# Altium PCB gY-950A20200704V1.PcbDoc (part 5 of 5)
Units mm, origin at the board's own origin, x right, y up, seen from the top; angles counter-clockwise.
Board outline 59.48 x 100.3 mm, 2 copper layers (Top Layer, Bottom Layer), stack 0.193 mm thick; 144 components, 124 nets, 550 pads, 234 vias.
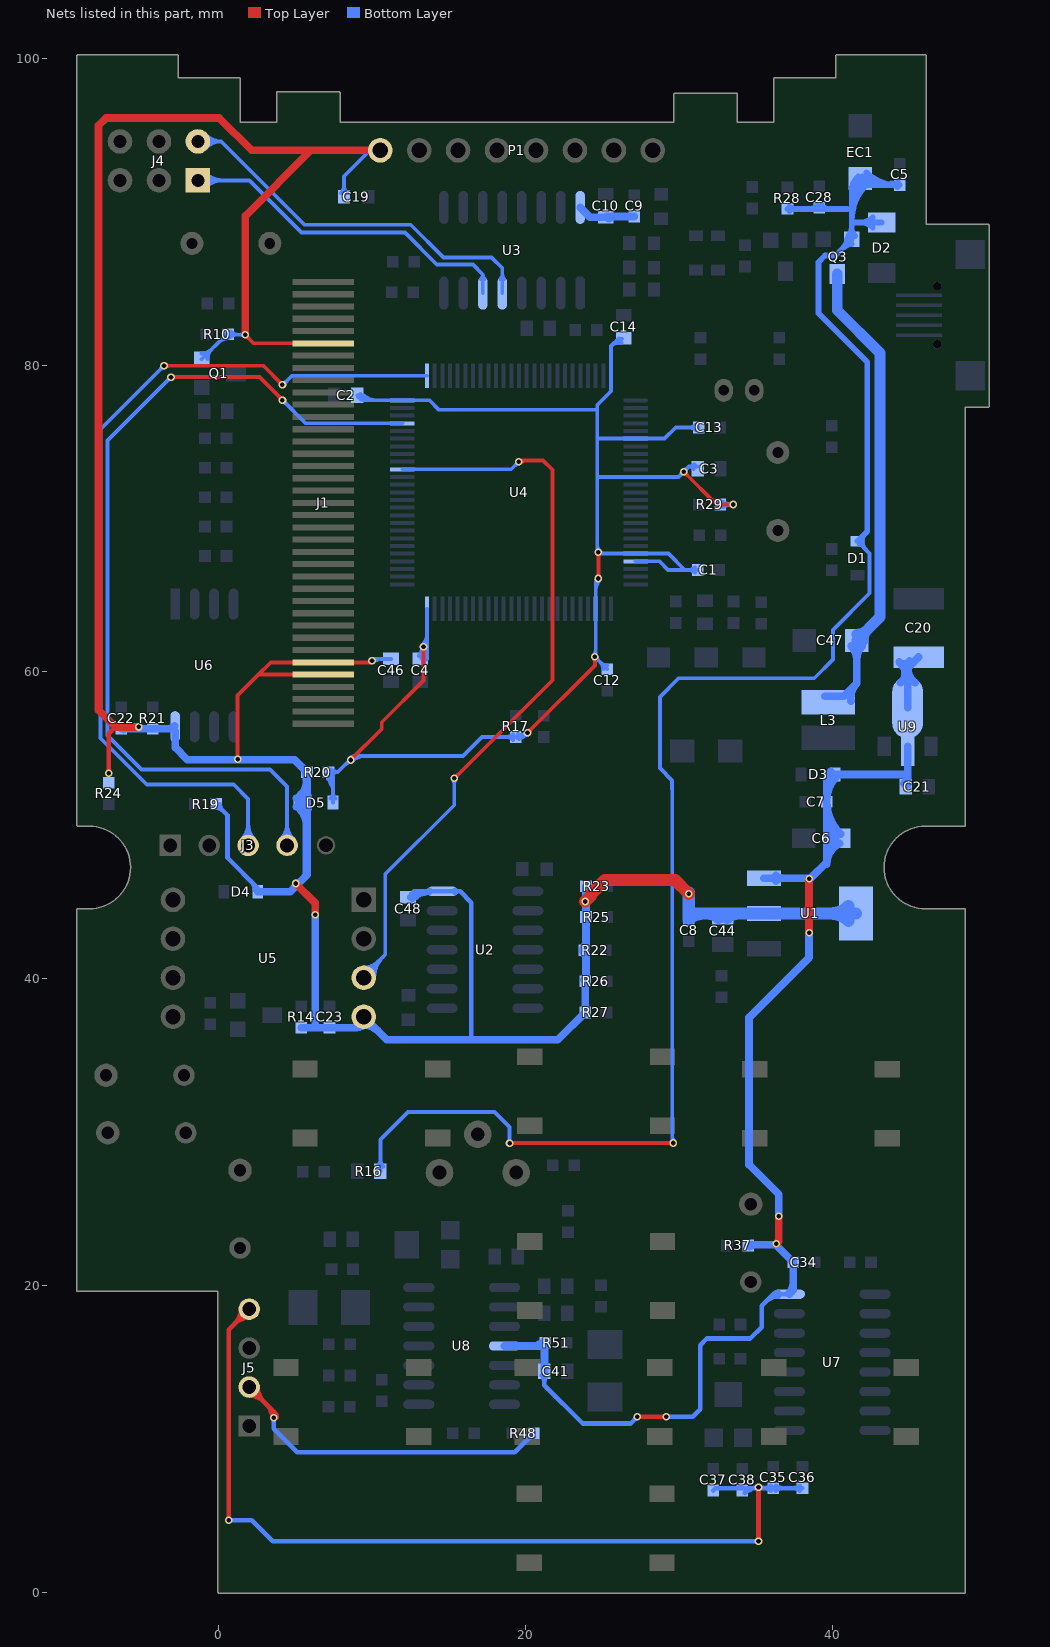
[diagram p5: the nets of this part, all layers, seen from the top]

## Via types
v1: diameter 0.5, hole 0.3, Top Layer to Bottom Layer, tented both sides, 234 vias

## Nets (pads, with @x,y where several pads share a name; then routed paths per layer and width w, separated by ;. In a path a pad name is that pad's centre, name@x,y a point inside that pad or via, vN(x,y) a via of type N, cw(c..) or ccw(c..) an arc to the next point about the centre after c; other vN are vias at no path point) (continued)
SPKP: U4.66 U5.3 | length 59.4
  Top Layer w0.254: v1(15.342,53.061) 21.738,59.457 21.738,73.181 21.137,73.783 19.63,73.783 v1(19.558,73.711) ; 15.552,53.271 cw(c15.342,53.481) 15.342,53.184 ccw(c15.342,53.481) 15.552,53.271 ; 15.552,53.271 ccw(c15.762,53.061) 15.465,53.061 cw(c15.762,53.061) 15.552,53.271 ; v1@19.645,73.624 cw(c20.029,73.24) 20.029,73.783 ccw(c20.029,73.24) v1@19.645,73.624
  Bottom Layer w0.25: U4.66@11.966,73.212 19.059,73.212 v1(19.558,73.711) ; 19.345,73.497 cw(c19.558,73.284) 19.558,73.586 ccw(c19.558,73.284) 19.345,73.497 ; 19.345,73.497 ccw(c19.131,73.711) 19.433,73.711 cw(c19.131,73.711) 19.345,73.497
  Bottom Layer w0.254: U5.3@9.322,40.056 10.846,41.58 10.846,46.812 15.342,51.308 v1(15.342,53.061) ; 15.342,52.764 cw(c15.639,52.764) 15.429,52.974 ccw(c15.639,52.764) 15.342,52.764 ; 15.342,52.764 ccw(c15.045,52.764) 15.255,52.974 cw(c15.045,52.764) 15.342,52.764 ; U5.3@9.449,40.729 ccw(c9.449,42.047) 10.381,41.115 cw(c9.449,42.047) U5.3@9.449,40.729 ; U5.3@9.868,40.056 cw(c11.186,40.056) 10.254,40.988 ccw(c11.186,40.056) U5.3@9.868,40.056 ; U5.3@10.122,40.056 cw(c12.053,40.056) 10.687,41.421 ccw(c12.053,40.056) U5.3@10.122,40.056
TCK/SWCLK: J3.3 U4.76 | length 68.8
  Top Layer w0.25: v1(-3.581,79.959) 2.896,79.959 v1(4.14,78.715) ; -3.28,79.959 cw(c-3.28,80.261) -3.493,80.048 ccw(c-3.28,80.261) -3.28,79.959 ; -3.28,79.959 ccw(c-3.28,79.657) -3.493,79.871 cw(c-3.28,79.657) -3.28,79.959 ; 3.927,78.928 cw(c3.713,78.715) 4.015,78.715 ccw(c3.713,78.715) 3.927,78.928 ; 3.927,78.928 ccw(c4.14,79.141) 4.14,78.84 cw(c4.14,79.141) 3.927,78.928
  Bottom Layer w0.25: v1(-3.581,79.959) -7.718,75.823 -7.718,55.673 -4.703,52.658 0.961,52.658 1.905,51.714 J3.3@1.905,48.688 ; v1@4.191,78.74 4.763,79.312 U4.76@13.566,79.312 ; -3.795,79.746 cw(c-3.581,79.532) -3.581,79.834 ccw(c-3.581,79.532) -3.795,79.746 ; -3.795,79.746 ccw(c-4.008,79.959) -3.706,79.959 cw(c-4.008,79.959) -3.795,79.746 ; 1.905,49.472 cw(c1.12,49.472) 1.675,48.918 ccw(c1.12,49.472) 1.905,49.472 ; 1.905,49.472 ccw(c2.69,49.472) 2.135,48.918 cw(c2.69,49.472) 1.905,49.472 ; 1.905,50.076 cw(c0.517,50.076) 1.498,49.094 ccw(c0.517,50.076) 1.905,50.076 ; 1.905,50.076 ccw(c3.293,50.076) 2.312,49.094 cw(c3.293,50.076) 1.905,50.076 ; v1@4.14,78.84 ccw(c4.14,79.203) 4.397,78.946 cw(c4.14,79.203) v1@4.14,78.84 ; v1@4.265,78.715 cw(c4.506,78.715) 4.336,78.885 ccw(c4.506,78.715) v1@4.265,78.715
TMS/SWDIO: J3.4 U4.72 | length 69
  Top Layer w0.25: v1(-3.124,79.223) 2.642,79.223 v1(4.14,77.724) ; -2.822,79.223 cw(c-2.822,79.524) -3.036,79.311 ccw(c-2.822,79.524) -2.822,79.223 ; -2.822,79.223 ccw(c-2.822,78.921) -3.036,79.134 cw(c-2.822,78.921) -2.822,79.223 ; 3.927,77.937 cw(c3.713,77.724) 4.015,77.724 ccw(c3.713,77.724) 3.927,77.937 ; 3.927,77.937 ccw(c4.14,78.151) 4.14,77.849 cw(c4.14,78.151) 3.927,77.937
  Bottom Layer w0.25: v1(-3.124,79.223) -7.264,75.082 -7.264,55.861 -5.049,53.645 3.327,53.645 4.445,52.527 J3.4@4.445,48.692 ; v1(4.14,77.724) 5.652,76.212 U4.72@11.966,76.212 ; -3.338,79.009 cw(c-3.124,78.796) -3.124,79.098 ccw(c-3.124,78.796) -3.338,79.009 ; -3.338,79.009 ccw(c-3.551,79.223) -3.249,79.223 cw(c-3.551,79.223) -3.338,79.009 ; 4.354,77.511 cw(c4.567,77.724) 4.265,77.724 ccw(c4.567,77.724) 4.354,77.511 ; 4.354,77.511 ccw(c4.14,77.297) 4.14,77.599 cw(c4.14,77.297) 4.354,77.511 ; 4.445,49.476 cw(c3.66,49.476) 4.215,48.922 ccw(c3.66,49.476) 4.445,49.476 ; 4.445,49.476 ccw(c5.23,49.476) 4.675,48.922 cw(c5.23,49.476) 4.445,49.476 ; 4.445,50.08 cw(c3.057,50.08) 4.038,49.098 ccw(c3.057,50.08) 4.445,50.08 ; 4.445,50.08 ccw(c5.833,50.08) 4.852,49.098 cw(c5.833,50.08) 4.445,50.08
USB_D+: J4.2 U3.5 | length 33.8
  Bottom Layer w0.25: J4.2@-1.372,94.59 0.152,94.59 ; U3.5@18.474,84.696 18.474,86.326 17.78,87.02 14.644,87.02 12.51,89.154 5.588,89.154 0.152,94.59 ; -0.412,94.59 cw(c-0.412,95.46) -1.057,94.875 ccw(c-0.412,95.46) -0.412,94.59 ; -0.412,94.59 ccw(c-0.412,93.719) -1.057,94.304 cw(c-0.412,93.719) -0.412,94.59 ; 0.152,94.59 cw(c0.152,95.972) -0.872,95.043 ccw(c0.152,95.972) 0.152,94.59 ; 0.152,94.59 ccw(c0.152,93.207) -0.872,94.136 cw(c0.152,93.207) 0.152,94.59 ; 18.474,85.905 cw(c18.04,85.905) 18.347,85.598 ccw(c18.04,85.905) 18.474,85.905 ; 18.474,85.905 ccw(c18.909,85.905) 18.602,85.598 cw(c18.909,85.905) 18.474,85.905
USB_D-: J4.1 U3.6 | length 32
  Bottom Layer w0.25: J4.1@-1.372,92.05 1.981,92.05 5.385,88.646 12.123,88.646 14.202,86.567 16.557,86.567 17.204,85.92 U3.6@17.204,84.696 ; -0.346,92.05 cw(c-0.346,93.076) -1.071,92.35 ccw(c-0.346,93.076) -0.346,92.05 ; -0.346,92.05 ccw(c-0.346,91.024) -1.071,91.749 cw(c-0.346,91.024) -0.346,92.05 ; 0.258,92.05 cw(c0.258,93.679) -0.894,92.527 ccw(c0.258,93.679) 0.258,92.05 ; 0.258,92.05 ccw(c0.258,90.42) -0.894,91.572 cw(c0.258,90.42) 0.258,92.05 ; 17.204,85.905 cw(c16.77,85.905) 17.077,85.598 ccw(c16.77,85.905) 17.204,85.905 ; 17.204,85.905 ccw(c17.639,85.905) 17.332,85.598 cw(c17.639,85.905) 17.204,85.905
VBAT: C1.1 C2.1 C3.1 C4.1 C12.1 C13.1 C14.1 D5.2 R17.1 R20.2 R29.2 U4.6 U4.11 U4.21 U4.22 U4.28 U4.50 U4.75 U4.100 | length 173.6
  Top Layer w0.25: v1(8.585,54.254) 10.617,56.286 10.617,56.718 13.335,59.436 v1(13.335,61.646) ; v1@8.585,54.379 ccw(c8.585,54.681) 8.799,54.468 ccw(c9.012,54.254) v1@8.71,54.254 ; v1(20.117,56.032) 24.511,60.427 v1(24.511,60.985) ; v1(24.74,66.091) v1@24.74,67.751 ; v1(30.307,73.055) 32.445,70.917 v1(33.528,70.917) ; 13.335,61.344 cw(c13.637,61.344) 13.423,61.557 ccw(c13.637,61.344) 13.335,61.344 ; 13.335,61.344 ccw(c13.033,61.344) 13.247,61.557 cw(c13.033,61.344) 13.335,61.344 ; 20.33,56.246 cw(c20.117,56.459) 20.117,56.157 ccw(c20.117,56.459) 20.33,56.246 ; 20.33,56.246 ccw(c20.544,56.032) 20.242,56.032 cw(c20.544,56.032) 20.33,56.246 ; 24.511,60.684 cw(c24.813,60.684) 24.599,60.897 ccw(c24.813,60.684) 24.511,60.684 ; 24.511,60.684 ccw(c24.209,60.684) 24.423,60.897 cw(c24.209,60.684) 24.511,60.684 ; 24.74,66.393 cw(c24.438,66.393) 24.651,66.179 ccw(c24.438,66.393) 24.74,66.393 ; 24.74,66.393 ccw(c25.041,66.393) 24.828,66.179 cw(c25.041,66.393) 24.74,66.393 ; 24.74,67.491 cw(c25.041,67.491) 24.828,67.704 ccw(c25.041,67.491) 24.74,67.491 ; 24.74,67.491 ccw(c24.438,67.491) 24.651,67.704 cw(c24.438,67.491) 24.74,67.491 ; 30.52,72.841 cw(c30.733,73.055) 30.432,73.055 ccw(c30.733,73.055) 30.52,72.841 ; 30.52,72.841 ccw(c30.307,72.628) 30.307,72.93 cw(c30.307,72.628) 30.52,72.841 ; 33.226,70.917 cw(c33.226,70.615) 33.44,70.828 ccw(c33.226,70.615) 33.226,70.917 ; 33.226,70.917 ccw(c33.226,71.219) 33.44,71.005 cw(c33.226,71.219) 33.226,70.917
  Bottom Layer w0.25: R20.2@7.092,53.215 cw(c7.011,52.771) 7.402,52.997 cw(c7.776,53.212) R20.2@7.375,53.372 ; 7.119,53.005 cw(c7.485,53.216) R20.2@7.142,53.463 ; 7.312,52.67 cw(c7.828,52.968) R20.2@7.345,53.317 ; D5.2@7.44,51.486 7.44,53.165 R20.2@7.137,53.467 7.747,53.467 ; 8.285,54.005 cw(c8.585,53.705) v1@8.585,54.129 ; v1@8.497,54.343 cw(c8.906,53.933) 8.906,54.512 ; v1@8.674,54.166 cw(c9.51,53.33) 9.51,54.512 ; v1@8.709,54.27 cw(c8.999,54.306) 8.792,54.512 ; C2.1@9.03,78.037 9.355,77.712 U4.75@11.966,77.712 13.728,77.712 14.351,77.089 24.663,77.089 ; C2.1@9.054,77.916 cw(c9.311,77.697) 9.48,77.99 ; C2.1@9.244,77.754 cw(c9.544,77.5) 9.74,77.84 ; C4.1@13.152,61.118 ccw(c13.003,61.674) 13.502,61.386 ; 13.228,61.395 ccw(c13.658,61.147) C4.1@13.251,60.864 ; v1@13.425,61.736 ccw(c14.014,61.396) C4.1@13.456,61.007 ; v1@13.441,61.712 cw(c13.626,61.828) 13.462,61.973 ; v1@13.451,61.599 ccw(c13.863,61.43) C4.1@13.49,61.187 ; C4.1@13.485,60.953 cw(c13.963,61.151) 13.515,61.409 ; C4.1@13.53,60.846 13.566,60.882 U4.50@13.566,64.112 ; 19.813,55.747 cw(c20.092,55.586) v1@20.11,55.908 ; 24.631,65.662 ccw(c24.315,65.845) v1@24.631,66.028 ; 24.681,72.712 U4.11@27.166,72.712 29.964,72.712 v1(30.307,73.055) 30.649,73.397 ; 24.686,75.212 U4.6@27.166,75.212 29.06,75.212 29.788,75.94 C13.1@31.275,75.94 ; v1(24.74,66.091) 24.566,65.917 U4.28@24.566,64.112 24.566,60.928 C12.1@25.323,60.172 ; C14.1@26.069,81.75 25.566,81.247 ; U4.22@27.166,67.212 28.724,67.212 29.287,66.649 30.375,66.649 ; C3.1@31.204,73.397 30.649,73.397 ; C1.1@31.218,66.649 30.375,66.649 ; R29.2@32.69,70.917 v1(33.528,70.917) ; 7.44,52.129 cw(c6.896,52.129) 7.281,51.745 ccw(c6.896,52.129) 7.44,52.129 ; 7.44,52.129 ccw(c7.983,52.129) 7.599,51.745 cw(c7.983,52.129) 7.44,52.129 ; 7.747,53.467 cw(c7.747,54.065) 7.32,53.646 ccw(c7.747,54.065) 7.747,53.467 ; 7.747,53.467 ccw(c7.747,52.869) 7.32,53.288 cw(c7.747,52.869) 7.747,53.467 ; 7.747,53.467 8.792,54.512 ; 8.792,54.512 15.91,54.512 17.151,55.753 R17.1@19.355,55.753 19.837,55.753 ; C4.1@13.127,61.196 ccw(c12.656,61.512) v1@13.212,61.622 ; C4.1@13.127,61.196 ccw(c12.656,61.512) v1@13.212,61.622 ; C4.1@13.127,61.196 ccw(c12.656,61.512) v1@13.212,61.622 ; v1@13.266,61.75 ccw(c12.931,62.252) 13.523,62.133 ; v1@13.266,61.75 ccw(c12.931,62.252) 13.523,62.133 ; v1@13.266,61.75 ccw(c12.931,62.252) 13.523,62.133 ; 18.737,55.753 cw(c18.737,55.135) 19.174,55.572 ccw(c18.737,55.135) 18.737,55.753 ; 18.737,55.753 ccw(c18.737,56.371) 19.174,55.934 cw(c18.737,56.371) 18.737,55.753 ; R17.1@19.729,55.716 ccw(c19.441,56.213) v1@19.996,56.065 ; R17.1@19.729,55.716 ccw(c19.441,56.213) v1@19.996,56.065 ; R17.1@19.729,55.716 ccw(c19.441,56.213) v1@19.996,56.065 ; 19.837,55.753 cw(c19.837,56.08) 19.567,55.897 ccw(c19.837,56.08) 19.837,55.753 ; 19.837,55.753 ccw(c19.837,55.426) 19.567,55.609 cw(c19.837,55.426) 19.837,55.753 ; 19.837,55.753 v1(20.117,56.032) ; 19.903,55.819 cw(c20.117,55.606) 20.117,55.907 ccw(c20.117,55.606) 19.903,55.819 ; 19.903,55.819 ccw(c19.69,56.032) 19.992,56.032 cw(c19.69,56.032) 19.903,55.819 ; v1(20.117,56.032) cw(c19.766,56.384) 19.495,55.967 ccw(c19.766,56.384) v1(20.117,56.032) ; 24.663,77.089 24.663,67.793 24.744,67.712 U4.21@27.166,67.712 29.312,67.712 30.375,66.649 ; 24.663,77.089 24.663,77.394 25.566,78.297 U4.100@25.566,79.312 25.566,81.247 ; v1@24.828,67.881 ccw(c25.236,68.289) 25.236,67.712 cw(c25.236,68.289) v1@24.828,67.881 ; v1@24.828,67.881 cw(c25.225,68.278) 24.663,68.278 ccw(c25.225,68.278) v1@24.828,67.881 ; 24.886,60.609 cw(c24.449,60.172) 25.067,60.172 ccw(c24.449,60.172) 24.886,60.609 ; 24.886,60.609 ccw(c25.323,61.046) 25.323,60.428 cw(c25.323,61.046) 24.886,60.609 ; 25.566,81.247 cw(c26.132,80.681) 26.254,81.472 ccw(c26.132,80.681) 25.566,81.247 ; 30.093,72.841 cw(c30.307,72.628) 30.307,72.93 ccw(c30.307,72.628) 30.093,72.841 ; 30.093,72.841 ccw(c29.88,73.055) 30.182,73.055 cw(c29.88,73.055) 30.093,72.841 ; 30.52,73.268 cw(c30.307,73.482) 30.307,73.18 ccw(c30.307,73.482) 30.52,73.268 ; 30.52,73.268 ccw(c30.733,73.055) 30.432,73.055 cw(c30.733,73.055) 30.52,73.268 ; 30.6,66.649 cw(c30.6,66.031) 31.037,66.468 ccw(c30.6,66.031) 30.6,66.649 ; 30.6,66.649 ccw(c30.6,67.267) 31.037,66.83 cw(c30.6,67.267) 30.6,66.649 ; 30.649,73.397 cw(c30.649,73.05) 30.956,73.214 ccw(c30.649,73.05) 30.649,73.397 ; 30.649,73.397 ccw(c30.649,73.898) 31.004,73.545 cw(c30.649,73.898) 30.649,73.397 ; 30.657,75.94 cw(c30.657,75.322) 31.094,75.759 ccw(c30.657,75.322) 30.657,75.94 ; 30.657,75.94 ccw(c30.657,76.558) 31.094,76.121 cw(c30.657,76.558) 30.657,75.94 ; 33.094,70.86 cw(c33.219,70.393) v1@33.465,70.809 ; 33.094,70.86 cw(c33.219,70.393) v1@33.465,70.809 ; 33.094,70.86 cw(c33.219,70.393) v1@33.465,70.809 ; 33.094,70.974 ccw(c33.219,71.441) v1@33.465,71.024 ; 33.094,70.974 ccw(c33.219,71.441) v1@33.465,71.024 ; 33.094,70.974 ccw(c33.219,71.441) v1@33.465,71.024 ; 33.226,70.917 cw(c33.226,70.615) 33.44,70.828 ccw(c33.226,70.615) 33.226,70.917 ; 33.226,70.917 ccw(c33.226,71.219) 33.44,71.005 cw(c33.226,71.219) 33.226,70.917 ; v1@33.308,70.917 cw(c33.308,71.535) 32.871,71.098 ccw(c33.308,71.535) v1@33.308,70.917 ; v1@33.308,70.917 ccw(c33.308,70.299) 32.871,70.736 cw(c33.308,70.299) v1@33.308,70.917 ; R20.2@6.956,53.286 cw(c5.79,52.119) 7.44,52.119 ccw(c5.79,52.119) R20.2@6.956,53.286 ; R20.2@7.133,53.463 cw(c6.393,52.723) 7.44,52.723 ccw(c6.393,52.723) R20.2@7.133,53.463 ; C2.1@9.052,77.958 ccw(c9.646,78.552) 9.646,77.712 cw(c9.646,78.552) C2.1@9.052,77.958 ; C2.1@9.229,78.135 ccw(c10.249,79.155) 10.249,77.712 cw(c10.249,79.155) C2.1@9.229,78.135 ; C4.1@13.026,61.045 ccw(c11.721,62.35) 13.566,62.35 cw(c11.721,62.35) C4.1@13.026,61.045 ; C4.1@13.203,60.868 ccw(c12.325,61.746) 13.566,61.746 cw(c12.325,61.746) C4.1@13.203,60.868 ; v1@13.247,61.734 ccw(c12.475,62.506) 13.566,62.506 cw(c12.475,62.506) v1@13.247,61.734 ; v1@13.252,61.553 cw(c12.62,60.848) 13.566,60.848 ccw(c12.62,60.848) v1@13.252,61.553 ; C4.1@13.379,60.691 ccw(c12.928,61.142) 13.566,61.142 cw(c12.928,61.142) C4.1@13.379,60.691 ; v1@13.418,61.739 cw(c13.122,61.408) 13.566,61.408 ccw(c13.122,61.408) v1@13.418,61.739 ; v1@13.423,61.557 ccw(c13.079,61.902) 13.566,61.902 cw(c13.079,61.902) v1@13.423,61.557 ; R17.1@19.358,55.758 ccw(c19.594,56.12) 19.899,55.814 cw(c19.594,56.12) R17.1@19.358,55.758 ; v1@24.423,61.074 ccw(c24.076,61.42) 24.566,61.42 cw(c24.076,61.42) v1@24.423,61.074 ; v1@24.511,60.86 cw(c24.511,60.563) 24.721,60.773 ccw(c24.511,60.563) v1@24.511,60.86 ; 24.566,65.37 cw(c25.46,65.37) 24.828,66.002 ccw(c25.46,65.37) 24.566,65.37 ; v1@24.636,60.985 ccw(c24.943,60.985) 24.726,60.769 cw(c24.943,60.985) v1@24.636,60.985 ; C14.1@25.914,81.595 cw(c26.225,81.284) 26.293,81.719 ccw(c26.225,81.284) C14.1@25.914,81.595
  other v1: 24.74,67.793
VBB: C5.1 C28.2 D1.2 D2.K EC1.1 Q3.S R16.2 R28.2 | length 153.9
  Top Layer w0.25: v1@18.847,29.286 v1@29.591,29.286 ; 29.315,29.286 cw(c29.315,28.984) 29.528,29.198 ccw(c29.315,28.984) 29.315,29.286 ; 29.315,29.286 ccw(c29.315,29.588) 29.528,29.375 cw(c29.315,29.588) 29.315,29.286 ; v1@19.037,29.172 cw(c19.312,28.898) 19.312,29.286 ccw(c19.312,28.898) v1@19.037,29.172
  Bottom Layer w0.25: R16.2@10.528,27.449 10.528,29.502 12.325,31.299 17.977,31.299 18.948,30.328 v1(18.948,29.261) ; v1@29.591,29.286 29.553,29.286 29.553,52.362 29.548,52.367 29.548,52.932 28.753,53.727 28.753,58.369 29.972,59.588 38.811,59.588 40.03,60.808 40.03,62.738 42.426,65.133 42.426,67.732 D1.2@41.631,68.527 ; D1.2@41.739,68.55 cw(c41.583,68.108) D1.2@42.035,68.23 ; 10.528,28.23 cw(c9.849,28.23) 10.329,27.749 ccw(c9.849,28.23) 10.528,28.23 ; 10.528,28.23 ccw(c11.208,28.23) 10.727,27.749 cw(c11.208,28.23) 10.528,28.23 ; 18.948,29.563 cw(c18.647,29.563) 18.86,29.349 ccw(c18.647,29.563) 18.948,29.563 ; 18.948,29.563 ccw(c19.25,29.563) 19.037,29.349 cw(c19.25,29.563) 18.948,29.563 ; 29.553,29.741 ccw(c30.071,29.741) 29.705,29.375 cw(c30.071,29.741) 29.553,29.741 ; D1.2@41.731,68.302 cw(c41.731,68) 41.944,68.213 ccw(c41.731,68) D1.2@41.731,68.302 ; D1.2@41.956,68.527 ccw(c42.74,68.527) 42.185,67.972 cw(c42.74,68.527) D1.2@41.956,68.527
  Bottom Layer w0.381: R28.2@37.065,90.191 40.977,90.191 ; 41.308,89.304 D2.K@43.205,89.304 ; EC1.1@41.35,91.837 cw(c40.775,91.422) 41.389,91.067 ; 41.505,91.269 cw(c42.156,90.893) EC1.1@41.962,91.619 ; D1.2@41.631,68.527 42.266,69.162 42.266,80.213 39.091,83.388 39.091,86.716 39.522,87.147 40.201,87.147 Q3.S@41.255,88.201 41.255,91.612 EC1.1@41.384,91.741 ; D1.2@41.806,68.527 D1.2@41.885,68.527 ; EC1.1@41.814,92.171 EC1.1@41.384,91.741 ; EC1.1@42.235,91.785 cw(c42.524,91.52) 42.72,91.86 ; EC1.1@42.366,92.319 ccw(c43.092,92.513) 42.716,91.862 ; C5.1@44.381,91.741 EC1.1@41.384,91.741 ; 37.525,90.191 cw(c37.525,90.651) 37.2,90.325 ccw(c37.525,90.651) 37.525,90.191 ; 37.525,90.191 ccw(c37.525,89.731) 37.2,90.056 cw(c37.525,89.731) 37.525,90.191 ; 40.727,87.673 cw(c41.255,87.145) 41.255,87.892 ccw(c41.255,87.145) 40.727,87.673 ; 40.727,87.673 ccw(c40.199,88.201) 40.946,88.201 cw(c40.199,88.201) 40.727,87.673 ; 41.255,88.949 cw(c40.508,88.949) 41.036,88.42 ccw(c40.508,88.949) 41.255,88.949 ; 41.255,88.949 ccw(c42.003,88.949) 41.474,88.42 cw(c42.003,88.949) 41.255,88.949 ; 41.846,89.304 cw(c41.846,88.195) 42.63,88.979 ccw(c41.846,88.195) 41.846,89.304 ; 41.846,89.304 ccw(c41.846,90.414) 42.63,89.629 cw(c41.846,90.414) 41.846,89.304 ; 43.921,91.741 cw(c43.921,91.281) 44.246,91.606 ccw(c43.921,91.281) 43.921,91.741 ; 43.921,91.741 ccw(c43.921,92.201) 44.246,91.876 cw(c43.921,92.201) 43.921,91.741 ; 38.505,90.191 ccw(c38.505,90.907) 39.012,90.401 cw(c38.505,90.907) 38.505,90.191 ; C28.2@39.281,90.401 ccw(c39.788,90.907) 39.788,90.191 cw(c39.788,90.907) C28.2@39.281,90.401 ; 41.255,89.443 cw(c44.542,89.443) 42.218,91.767 ccw(c44.542,89.443) 41.255,89.443 ; 41.255,90.363 cw(c43.622,90.363) 41.948,92.036 ccw(c43.622,90.363) 41.255,90.363 ; 41.255,91.283 cw(c42.702,91.283) 41.679,92.306 ccw(c42.702,91.283) 41.255,91.283 ; D1.2@41.89,68.527 cw(c42.517,68.527) 42.074,68.97 ccw(c42.517,68.527) D1.2@41.89,68.527 ; EC1.1@41.948,92.306 ccw(c43.311,93.668) 43.311,91.741 cw(c43.311,93.668) EC1.1@41.948,92.306 ; EC1.1@42.218,92.575 ccw(c44.231,94.588) 44.231,91.741 cw(c44.231,94.588) EC1.1@42.218,92.575 ; 43.841,91.838 ccw(c43.982,92.404) 44.283,91.904 cw(c43.982,92.404) 43.841,91.838
  other v1: 29.616,29.286
VCC3.3: C8.2 C19.1 C22.2 C23.2 C44.2 C46.1 C48.2 D4.2 D5.1 J1.6 J1.32 J1.33 P1.1 Q1.S R10.1 R14.1 R19.1 R20.1 R21.2 R22.1 R23.1 R24.1 R25.1 R26.1 R27.1 U1.2 U2.14 U5.4 U6.8 | length 275.7
  Top Layer w0.25: v1(1.219,54.305) 1.219,58.471 2.574,59.825 ; v1(1.708,81.986) 2.269,81.425 J1.6@6.807,81.425 ; J1.33@6.807,59.825 2.574,59.825 ; v1@9.876,60.625 J1.32@6.807,60.625 3.374,60.625 2.574,59.825 ; 1.921,81.773 cw(c2.135,81.986) 1.833,81.986 ccw(c2.135,81.986) 1.921,81.773 ; 1.921,81.773 ccw(c1.708,81.56) 1.708,81.861 cw(c1.708,81.56) 1.921,81.773
  Top Layer w0.3: v1(-7.188,53.391) -7.188,55.982 -6.756,56.413
  Top Layer w0.5: v1(-5.232,56.413) -6.756,56.413 -7.849,57.506 -7.849,95.631 -7.366,96.114 0.025,96.114 2.132,94.007 5.991,94.007 5.989,94.004 ; v1(1.708,81.986) 1.708,89.724 5.989,94.004 ; v1(5.004,46.203) 6.274,44.933 v1(6.274,44.171) ; P1.1@10.512,94.004 5.989,94.004
  Top Layer w0.8: v1(23.876,45.034) 24.257,45.415 24.257,45.517 25.171,46.431 29.744,46.431 v1(30.633,45.542)
  Bottom Layer w0.25: Q1.S@-1.129,80.386 0.498,82.012 R10.1@0.591,82.012 0.616,81.986 v1(1.708,81.986) ; Q1.S@-1.129,80.761 ccw(c-1.129,81.666) -0.489,81.026 ccw(c0.152,80.386) Q1.S@-0.754,80.386 ; -0.005,81.509 cw(c0.591,80.913) R10.1@0.591,81.756 ; R10.1@0.219,81.734 ccw(c-0.059,82.012) R10.1@0.335,82.012 ; R10.1@0.772,81.831 cw(c1.147,81.455) 1.147,81.986 ; R10.1@0.772,82.193 ccw(c1.27,82.691) 1.27,81.986 ; v1@1.62,81.898 ccw(c1.406,81.685) 1.406,81.986 ccw(c1.406,82.288) v1@1.62,82.075 ; C19.1@7.953,91.223 ccw(c7.483,91.692) 8.147,91.692 ccw(c8.811,91.692) C19.1@8.342,91.223 ; C19.1@8.147,90.978 8.147,92.323 9.829,94.004 P1.1@10.512,94.004 ; v1(9.982,60.731) 10.097,60.846 C46.1@11.218,60.846 ; v1@10.07,60.82 ccw(c10.217,60.967) 10.321,60.787
  Bottom Layer w0.3: C22.2@-6.213,56.122 cw(c-5.486,55.395) -5.486,56.423 ; C22.2@-6.179,56.405 ccw(c-5.98,56.525) -5.864,56.324 ; R19.1@-0.178,51.384 0.559,50.648 0.559,47.879 D4.2@2.535,45.903 ; v1@5.004,46.303 ccw(c5.004,46.973) 5.478,46.499 ; D5.1@5.179,51.188 cw(c5.089,50.602) 5.603,50.898 ; D5.1@5.21,51.486 5.613,51.082 ; v1@5.232,46.253 5.613,46.634 5.613,46.642 5.613,51.082 ; D5.1@5.401,51.327 ccw(c6.391,51.024) 5.494,50.507 ; C48.2@12.398,45.332 cw(c13.272,44.458) 13.272,45.693 ; C48.2@12.41,45.262 ccw(c12.632,45.708) 12.882,45.276 ; C48.2@12.544,45.53 ccw(c12.931,46.306) 13.365,45.555 ; C48.2@12.72,45.693 U2.14@14.554,45.693 15.724,45.693 16.459,44.958 16.459,36.017 ; 13.4,45.534 ccw(c13.268,46.025) U2.14@13.709,45.771 ; U2.14@13.734,45.584 ccw(c13.469,45.32) 13.469,45.693 ccw(c13.469,46.067) U2.14@13.734,45.803 ; 0.217,50.99 cw(c0.611,51.384) 0.053,51.384 ccw(c0.611,51.384) 0.217,50.99 ; 0.217,50.99 ccw(c-0.178,50.596) -0.178,51.153 cw(c-0.178,50.596) 0.217,50.99 ; 5.613,51.082 ccw(c5.332,50.801) 5.251,51.19 cw(c5.332,50.801) 5.613,51.082 ; 15.639,45.693 cw(c15.639,46.067) 15.375,45.803 ccw(c15.639,46.067) 15.639,45.693 ; 15.639,45.693 ccw(c15.639,45.32) 15.375,45.584 cw(c15.639,45.32) 15.639,45.693 ; 2.099,46.339 cw(c1.529,45.769) 2.335,45.769 ccw(c1.529,45.769) 2.099,46.339 ; D5.1@5.068,51.244 cw(c3.752,49.928) 5.613,49.928 ccw(c3.752,49.928) D5.1@5.068,51.244 ; D5.1@5.28,51.457 cw(c4.476,50.652) 5.613,50.652 ccw(c4.476,50.652) D5.1@5.28,51.457 ; C48.2@12.611,45.119 cw(c13.996,43.734) 13.996,45.693 ccw(c13.996,43.734) C48.2@12.611,45.119
  Bottom Layer w0.5: C22.2@-6.376,56.285 -3.006,56.285 -2.855,56.134 -2.855,55.077 -2.057,54.28 4.928,54.28 R20.1@5.74,53.467 5.74,52.017 ; -4.923,56.285 cw(c-4.923,56.722) v1(-5.232,56.413) ; D4.2@2.535,45.669 4.64,45.669 5.613,46.642 5.74,46.769 5.74,52.017 ; 4.884,45.912 ccw(c4.593,46.203) v1(5.004,46.203) ccw(c5.004,46.613) 5.294,46.323 ; D5.1@5.059,51.215 ccw(c5.204,51.571) D5.1@5.536,51.379 ; D5.1@5.059,51.756 cw(c5.204,51.4) D5.1@5.536,51.593 ; D5.1@5.21,51.486 5.74,52.017 ; D5.1@5.247,51.293 cw(c5.422,50.864) 5.823,51.096 ; D5.1@5.247,51.678 ccw(c5.422,52.107) 5.823,51.876 ; D5.1@5.306,51.36 ccw(c5.858,51.212) 5.363,50.926 ; D5.1@5.306,51.612 cw(c5.858,51.76) 5.363,52.045 ; R14.1@5.359,36.805 6.274,36.805 ; v1(6.274,44.171) 6.274,36.805 ; 8.738,36.805 6.274,36.805 ; 8.818,36.805 ccw(c8.818,38.146) U5.4@9.767,37.198 ; U5.4@9.449,36.966 cw(c9.449,35.638) 10.388,36.577 ; U5.4@9.449,37.516 10.947,36.017 16.459,36.017 22.098,36.017 R27.1@23.876,37.795 R26.1@23.876,39.827 ; R22.1@23.733,41.767 cw(c23.264,41.298) 23.927,41.298 ; R22.1@23.733,41.952 ccw(c23.264,42.421) 23.927,42.421 ; R26.1@23.783,39.92 ccw(c23.437,40.266) 23.927,40.266 ; R26.1@23.927,39.878 R25.1@23.927,44.018 R23.1@23.927,46.025 ; v1(-5.232,56.413) cw(c-5.541,56.722) -5.541,56.285 ccw(c-5.541,56.722) v1(-5.232,56.413) ; -3.351,56.285 ccw(c-3.351,56.919) -2.903,56.471 cw(c-3.351,56.919) -3.351,56.285 ; D5.1@5.139,51.315 cw(c3.687,49.863) 5.74,49.863 ccw(c3.687,49.863) D5.1@5.139,51.315 ; D5.1@5.139,51.657 ccw(c3.687,53.109) 5.74,53.109 cw(c3.687,53.109) D5.1@5.139,51.657 ; D5.1@5.21,51.686 ccw(c5.21,52.169) 5.551,51.827 cw(c5.21,52.169) D5.1@5.21,51.686 ; D5.1@5.492,51.303 ccw(c4.894,51.902) 5.74,51.902 cw(c4.894,51.902) D5.1@5.492,51.303 ; D5.1@5.492,51.669 cw(c4.894,51.07) 5.74,51.07 ccw(c4.894,51.07) D5.1@5.492,51.669 ; R20.1@5.627,53.402 cw(c5.079,53.085) 5.69,52.921 ccw(c5.079,53.085) R20.1@5.627,53.402
  Bottom Layer w0.8: v1@30.633,45.619 v1(30.633,45.542) C8.2@30.633,43.841 31.042,44.25 ; U1.2@41.542,44.25 U1.2@35.542,44.25 31.042,44.25 ; 31.042,44.25 ccw(c31.042,43.822) 30.614,43.842 cw(c31.042,43.822) 31.042,44.25 ; 39.852,44.25 cw(c39.852,42.56) 41.047,43.755 ccw(c39.852,42.56) 39.852,44.25 ; 39.852,44.25 ccw(c39.852,45.94) 41.047,44.745 cw(c39.852,45.94) 39.852,44.25 ; C8.2@30.62,43.855 cw(c31.575,42.9) 31.575,44.25 ccw(c31.575,42.9) C8.2@30.62,43.855 ; 31.867,44.25 cw(c31.867,43.237) 32.583,43.954 ccw(c31.867,43.237) 31.867,44.25 ; C44.2@33.125,43.954 cw(c33.841,43.237) 33.841,44.25 ccw(c33.841,43.237) C44.2@33.125,43.954
VCC5: C9.1 C10.1 U3.16 | length 4.6
  Bottom Layer w0.508: U3.16@23.554,90.284 24.189,89.649 C10.1@25.231,89.649 25.27,89.688 C9.1@27.077,89.688 ; C10.1@25.44,89.541 cw(c25.795,89.187) 25.795,89.688 ccw(c25.795,89.187) C10.1@25.44,89.541
"VDD 5V": C6.2 C7.2 C20.1 C21.1 C34.1 C41.2 D3.2 R37.2 R51.1 U1.3 U7.16 U8.4 U9.2 | length 135.2
  Top Layer w0.3: v1(27.28,11.43) v1(29.163,11.43)
  Top Layer w0.508: v1(36.347,22.708) 36.5,22.86 v1(36.5,24.511) ; v1(38.481,43.002) v1(38.481,46.507) ; v1@36.35,22.705 ccw(c35.989,23.066) 36.5,23.066 cw(c35.989,23.066) v1@36.35,22.705
  Bottom Layer w0.3: C41.2@21.222,14.41 21.222,13.5 23.724,10.998 26.848,10.998 v1(27.28,11.43) ; v1(29.163,11.43) 30.882,11.43 31.369,11.917 31.369,16.104 31.801,16.535 34.646,16.535 35.382,17.272 35.382,18.669 36.144,19.431 ; 35.81,19.096 ccw(c35.582,19.95) U7.16@36.347,19.508 ; U7.16@37.193,19.431 36.144,19.431 ; 21.222,13.69 cw(c21.841,13.69) 21.403,14.128 ccw(c21.841,13.69) 21.222,13.69 ; 21.222,13.69 ccw(c20.603,13.69) 21.04,14.128 cw(c20.603,13.69) 21.222,13.69 ; 36.144,19.431 cw(c36.144,19.141) 36.364,19.33 ccw(c36.144,19.141) 36.144,19.431 ; 36.144,19.431 ccw(c36.144,19.721) 36.364,19.532 cw(c36.144,19.721) 36.144,19.431 ; 35.641,18.928 cw(c36.481,18.088) 36.481,19.276 ccw(c36.481,18.088) 35.641,18.928 ; 36.154,19.44 cw(c36.481,19.113) 36.481,19.576 ccw(c36.481,19.113) 36.154,19.44
  Bottom Layer w0.508: U8.4@18.618,16.053 21.082,16.053 21.222,15.913 C41.2@21.222,14.41 ; 20.808,16.122 cw(c21.038,15.725) R51.1@21.232,16.141 ; R37.2@34.519,22.606 34.569,22.657 36.297,22.657 C34.1@37.441,21.513 37.441,19.679 U7.16@37.193,19.431 ; U1.3@35.542,46.55 38.575,46.55 39.625,47.601 C7.2@39.625,51.536 ; v1(36.5,24.511) 36.5,25.933 34.569,27.864 34.569,37.465 38.481,41.377 v1(38.481,43.002) ; 39.673,49.893 ccw(c40.329,50.305) C6.2@40.299,49.531 ; 39.84,48.264 ccw(c39.47,48.682) C6.2@39.954,48.96 ; C6.2@39.849,49.613 cw(c39.425,49.346) C6.2@39.913,49.235 ; C20.1@44.545,60.538 cw(c44.396,60.011) 44.925,60.153 cw(c45.556,60.322) C20.1@45.027,60.706 ; 44.806,53.315 D3.2@40.18,53.315 39.625,52.759 C7.2@39.625,51.536 ; C21.1@44.907,52.658 U9.2@44.907,55.143 ; U9.2@44.907,57.683 44.907,60.259 ; C20.1@45.616,60.968 44.907,60.259 ; 36.736,46.55 cw(c36.736,47.144) 36.316,46.724 ccw(c36.736,47.144) 36.736,46.55 ; 36.736,46.55 ccw(c36.736,45.957) 36.316,46.376 cw(c36.736,45.957) 36.736,46.55 ; C7.2@39.625,51.536 ccw(c42.499,51.535) 40.544,49.429 cw(c42.499,51.535) C7.2@39.625,51.536 ; 44.723,59.997 cw(c44.124,59.837) 44.477,59.327 ccw(c44.124,59.837) 44.723,59.997 ; 44.723,59.997 ccw(c45.632,60.24) 45.23,59.389 cw(c45.632,60.24) 44.723,59.997 ; 44.907,60.259 cw(c43.69,60.259) 44.44,59.3 ccw(c43.69,60.259) 44.907,60.259 ; 44.907,60.259 ccw(c46.124,60.259) 45.374,59.3 cw(c46.124,60.259) 44.907,60.259 ; 20.488,16.053 ccw(c20.488,17.053) 21.196,16.346 cw(c20.488,17.053) 20.488,16.053 ; 21.222,15.796 cw(c21.746,15.796) 21.375,16.166 ccw(c21.746,15.796) 21.222,15.796 ; R37.2@34.608,22.516 cw(c34.948,22.177) 34.948,22.657 ccw(c34.948,22.177) R37.2@34.608,22.516 ; U7.16@37.157,19.467 ccw(c36.471,20.152) 37.441,20.152 cw(c36.471,20.152) U7.16@37.157,19.467 ; 39.625,47.466 cw(c41.127,47.466) 40.455,48.809 ccw(c41.127,47.466) 39.625,47.466 ; 39.625,48.288 cw(c40.715,48.288) 40.228,49.264 ccw(c40.715,48.288) 39.625,48.288 ; 39.625,49.111 cw(c40.304,49.111) 40,49.718 ccw(c40.304,49.111) 39.625,49.111 ; 39.625,49.206 ccw(c40.336,49.206) 39.852,48.685 cw(c40.336,49.206) 39.625,49.206 ; 39.625,50.371 ccw(c41.418,50.371) 40.198,49.057 cw(c41.418,50.371) 39.625,50.371 ; C7.2@39.625,51.642 cw(c41.752,51.642) 40.248,53.147 ccw(c41.752,51.642) C7.2@39.625,51.642 ; 39.625,52.497 cw(c40.25,52.497) 40.19,53.119 ccw(c40.25,52.497) 39.625,52.497 ; 39.625,52.869 cw(c40.526,52.869) 39.889,53.506 ccw(c40.526,52.869) 39.625,52.869 ; D3.2@39.846,52.98 cw(c40.18,52.645) 40.18,53.119 ccw(c40.18,52.645) D3.2@39.846,52.98 ; C20.1@44.35,60.652 cw(c43.006,59.308) 44.907,59.308 ccw(c43.006,59.308) C20.1@44.35,60.652 ; C20.1@44.628,60.523 cw(c44.602,60.219) 44.907,60.219 ccw(c44.602,60.219) C20.1@44.628,60.523 ; C21.1@44.66,52.728 ccw(c44.062,53.326) 44.907,53.326 cw(c44.062,53.326) C21.1@44.66,52.728
VIN: C47.1 L3.1 Q3.D | length 40.4
  Bottom Layer w0.508: L3.1@39.522,58.42 40.742,58.42 41.581,59.259 ; C47.1@41.581,62.051 41.581,59.259 ; 41.581,59.259 ccw(c42.512,58.328) 41.214,58.106 cw(c42.512,58.328) 41.581,59.259 ; 41.581,60.825 cw(c42.807,60.825) 41.94,61.692 ccw(c42.807,60.825) 41.581,60.825 ; 41.581,60.825 ccw(c40.354,60.825) 41.222,61.692 cw(c40.354,60.825) 41.581,60.825
  Bottom Layer w0.7: Q3.D@40.315,85.951 40.315,83.586 43.104,80.797 43.104,63.574 C47.1@41.581,62.051 ; C47.1@42.284,62.755 cw(c41.581,63.458) 41.581,62.463 ccw(c41.581,63.458) C47.1@42.284,62.755 ; C47.1@42.284,62.755 ccw(c42.987,62.051) 41.993,62.051 cw(c42.987,62.051) C47.1@42.284,62.755
WHITE: J5.2 R48.1 | length 32.4
  Top Layer w0.3: J5.2@1.922,13.363 ccw(c2.824,13.548) 2.585,12.658 ; J5.2@1.971,13.373 3.581,11.762 v1(3.581,11.379) ; J5.2@1.981,13.422 cw(c1.796,12.52) 2.685,12.758 ; 3.365,11.813 ccw(c3.917,11.96) v1@3.631,11.466 ; 2.91,12.434 cw(c3.848,13.373) 2.521,13.373 ccw(c3.848,13.373) 2.91,12.434 ; 2.91,12.434 ccw(c1.971,11.495) 1.971,12.823 cw(c1.971,11.495) 2.91,12.434 ; 3.14,12.204 cw(c2.315,11.379) 3.481,11.379 ccw(c2.315,11.379) 3.14,12.204 ; 3.652,11.692 cw(c3.34,11.379) 3.781,11.379 ccw(c3.34,11.379) 3.652,11.692
  Bottom Layer w0.3: v1(3.581,11.379) 3.581,10.643 5.105,9.119 19.279,9.119 R48.1@20.523,10.363 ; 20.129,9.969 cw(c20.523,9.575) 20.523,10.132 ccw(c20.523,9.575) 20.129,9.969 ; 20.129,9.969 ccw(c19.735,10.363) 20.292,10.363 cw(c19.735,10.363) 20.129,9.969
YELLOW: C35.1 C36.1 C37.1 C38.1 J5.4 | length 72.6
  Top Layer w0.3: v1(0.635,4.699) 0.635,17.113 J5.4@1.975,18.453 ; 1.36,17.738 ccw(c1.122,18.628) J5.4@2.024,18.443 ; v1(35.179,3.327) v1(35.179,6.833) ; 1.036,17.514 cw(c1.975,16.575) 1.975,17.903 ccw(c1.975,16.575) 1.036,17.514 ; 1.036,17.514 ccw(c0.097,18.453) 1.425,18.453 cw(c0.097,18.453) 1.036,17.514
  Bottom Layer w0.3: v1(0.635,4.699) 2.134,4.699 3.505,3.327 v1(35.179,3.327) ; C37.1@32.221,6.63 32.373,6.783 C35.1@36.145,6.783 C36.1@38.044,6.783 ; C38.1@34.311,6.76 ccw(c34.525,6.906) 34.655,6.682 ; 35.588,6.783 cw(c35.588,6.225) 35.982,6.619 ccw(c35.588,6.225) 35.588,6.783 ; 35.588,6.783 ccw(c35.588,7.34) 35.982,6.946 cw(c35.588,7.34) 35.588,6.783 ; 36.703,6.783 cw(c36.703,7.34) 36.309,6.946 ccw(c36.703,7.34) 36.703,6.783 ; 36.703,6.783 ccw(c36.703,6.225) 36.309,6.619 cw(c36.703,6.225) 36.703,6.783 ; 37.486,6.783 cw(c37.486,6.225) 37.881,6.619 ccw(c37.486,6.225) 37.486,6.783 ; 37.486,6.783 ccw(c37.486,7.34) 37.881,6.946 cw(c37.486,7.34) 37.486,6.783 ; C38.1@34.283,6.467 cw(c35.045,5.705) 35.045,6.783 ccw(c35.045,5.705) C38.1@34.283,6.467 ; 34.817,6.783 ccw(c34.817,7.194) 35.108,6.903 cw(c34.817,7.194) 34.817,6.783 ; v1@35.25,6.903 ccw(c35.541,7.194) 35.541,6.783 cw(c35.541,7.194) v1@35.25,6.903
pads on no net: BAT1.0 J1.11 J1.12 J1.13 J1.14 J1.15 J2. J2.MH1 J2.MH2 U2.3 U2.4 U2.5 U2.6 U2.10 U2.11 U2.12 U2.13 U3.9 U3.10 U3.11 U3.12 U3.13 U3.14 U3.15 U4.3 U4.4 U4.5 U4.7 U4.16 U4.17 U4.18 U4.24 U4.73 U4.77 U4.79 U4.80 U4.83 U4.84 U4.87 U4.89 U4.90 U4.91 U4.95 U4.96 U7.2 U7.3 U7.4 U7.5 U7.6 U7.7 U7.13 U7.14 U7.15 Y1.0 Y2.1@36.44,69.228 Y2.2@36.44,74.308 Y2.175 Y2.176 Y3.1@-1.765,87.943 Y3.2@3.315,87.943 Y3.175 Y3.176

## Polygon pours and split planes (outlines as drawn)
GND on Bottom Layer "Bottom Overlay-No Net" (solid, remove dead copper, pour order 14): 33.172,95.631 33.172,90.094 34.442,88.824 40.564,82.702 40.564,77.851 40.564,66.548 39.345,65.329 39.014,64.999 35.636,64.999 30.455,64.999 29.235,63.779 29.058,63.602 29.058,55.855 29.058,40.361 30.455,38.964 30.505,38.913 33.528,38.913 48.057,38.913 48.514,38.456 48.6,38.37 48.6,25.171 48.6,0 48.575,0.025 43.84,0.025 0.025,0.025 0,0 0,19.671 -9.2,19.671 -9.2,100.169 32.927,100.169 32.969,100.127
PGND on Bottom Layer "Bottom Overlay-No Net" (solid, remove dead copper, pour order 12): 48.158,40.056 47.727,39.624 47.168,39.624 31.598,39.624 29.921,41.3 29.921,44.831 30.048,44.958 29.921,45.085 29.921,48.641 29.921,63.449 30.81,64.338 30.861,64.287 38.887,64.287 38.913,64.287 41.097,66.472 41.046,66.523 41.046,82.702 41.046,83.058 33.477,90.627 33.426,90.678 33.426,96.647 36.805,100.025 40.894,100.025 49.555,100.025 50.343,99.238 50.216,99.111 50.216,86.843 50.216,42.113 47.752,39.649
BLACK on Bottom Layer "Bottom Overlay-No Net" (solid, remove dead copper, pour order 2): 38.456,21.946 42.088,21.946 42.781,21.253 42.951,21.082 42.951,14.656 42.951,5.715 41.707,4.47 41.173,3.937 34.265,3.937 2.007,3.937 0.102,5.842 0,5.944 0,12.116 0,18.948 1.6,20.549 3.2,22.149 6.706,22.149
GND on Top Layer "Bottom Overlay-No Net" (solid, remove dead copper, pour order 8): 33.02,97.587 33.02,90.246 34.798,88.468 40.564,82.702 40.564,79.781 40.564,67.183 39.446,66.065 38.379,64.999 35.306,64.999 30.455,64.999 29.439,63.983 29.134,63.678 29.134,56.49 29.134,40.665 30.251,39.548 30.81,38.989 33.096,38.989 47.904,38.989 48.184,38.71 48.463,38.43 48.463,37.694 48.463,0.127 48.336,0 46.406,0 0,0 0,19.671 -9.2,19.671 -9.195,19.676 -9.195,44.45 -9.195,99.873 -9.398,100.076 -8.941,100.533 32.817,100.533
MGND on Top Layer "Bottom Overlay-No Net" (solid, remove dead copper, pour order 6): 24.333,22.708 30.632,22.708 31.801,21.539 32.36,20.98 32.36,17.196 32.36,12.776 30.988,11.405 30.607,11.024 12.675,11.024 6.985,11.024 4.953,13.056 4.75,13.259 4.75,20.422 4.75,21.082 6.426,22.758
PGND on Top Layer "Bottom Overlay-No Net" (solid, remove dead copper, pour order 4): 36.23,98.669 40.28,98.669 40.28,100.169 46.05,100.169 46.05,89.222 46.152,89.12 50.15,89.12 50.15,77.32 48.6,77.32 48.6,50 48.575,49.975 45.619,49.975 ccw(c45.619,48.292) 44.429,49.482 43.818,48.871 ccw(c44.886,47.804) 43.376,47.804 43.376,46.608 ccw(c44.705,46.608) 43.765,45.668 44.755,44.679 ccw(c45.186,45.11) 45.186,44.5 48.6,44.5 48.6,40.497 47.803,39.7 47.752,39.649 32.791,39.649 31.547,39.649 29.921,41.275 29.921,51.892 29.921,63.398 30.531,64.008 30.81,64.287 33.68,64.287 38.938,64.287 40.996,66.345 41.097,66.446 41.097,82.931 41.097,83.033 38.176,85.954 33.426,90.703 33.426,94.869 33.426,97.333 34.011,97.917

## Keep-outs
Keep-Out Layer:
  circle w0.127: c-6.37,41.61 r1
  circle w0.127: c-6.37,98.11 r1
  circle w0.127: c46.9,2.5 r1
  circle w0.127: c45.6,41.61 r1
  circle w0.127: c43.63,98.11 r1
  circle w0.127: c-6.37,38.11 r0.7
  circle w0.127: c46.9,6 r0.7
  circle w0.127: c2.13,2.5 r1
  lines w0.127: 4.05,0 0,0 ; 46.05,0 48.6,0 ; 0,0 0,19.671 -9.2,19.671 -9.2,44.5 -8.45,44.5 ccw(c-8.45,47.25) -8.45,50 -9.2,50 -9.2,100.169 -2.72,100.169 -2.72,98.669 1.33,98.669 1.33,95.769 3.83,95.769 3.83,97.77 7.83,97.77 7.83,95.769 29.73,95.769 29.73,97.67 33.73,97.67 33.73,95.769 36.23,95.769 36.23,98.669 40.28,98.669 40.28,100.169 46.05,100.169 46.05,89.12 50.15,89.12 50.15,77.32 48.6,77.32 48.6,50 46.05,50 ccw(c46.05,47.25) 46.05,44.5 48.6,44.5 48.6,0 ; 0,0 48.6,0 ; 48.6,0 48.6,0

## Other copper
Bottom Layer:
  rectangle net PGND: 32.41,39.954 33.147,41.91
  rectangle net NetD2_A: 43.866,84.582 46.177,86.639
  rectangle net PGND: 46.152,53.721 46.838,54.966

## Silkscreen, mask and mechanical layers (free items; w line width, h text height)
Bottom Overlay:
  text "+" at 116.977,66.776 h0.7
Top Paste:
  lines w0.127: 1.643,19.626 4.144,19.626